# Altium PCB PCB1.PcbDoc
Units mil, origin at the board's own origin, x right, y up, seen from the top; angles counter-clockwise.
Board outline 540 x 340 mil, 2 copper layers (Top Layer, Bottom Layer); 5 components, 5 nets, 12 pads, 0 vias.
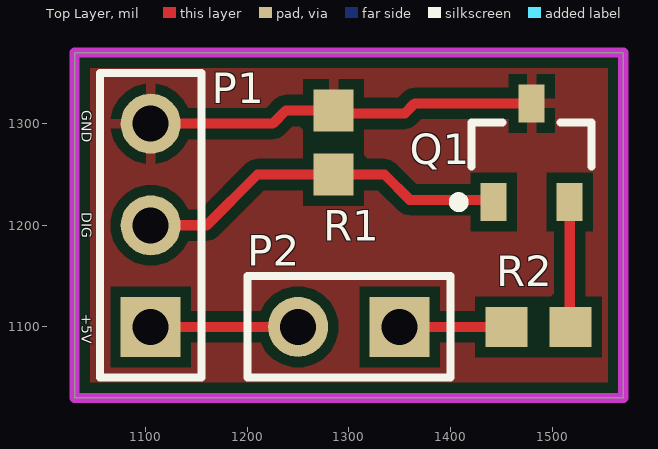
[diagram p0: Top Layer view]
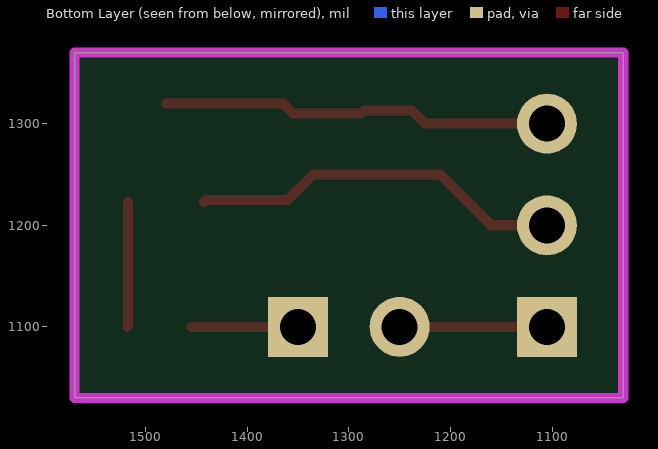
[diagram p1: Bottom Layer view, seen from below]

## Layer stack, top to bottom
Top Solder: solder mask 0.4, Solder Resist, Dk 3.5
Top Layer: signal copper 1.4
Dielectric 1: dielectric 12.6, FR-4, Dk 4.8
Bottom Layer: signal copper 1.4
Bottom Solder: solder mask 0.4, Solder Resist, Dk 3.5

## Board outline
1030,1030 1030,1370 1570,1370 1570,1030

## Design rules (kind name [scope] priority, off if disabled: settings)
Clearance [All] p1: gap=10 ignorepadtopadclearanceinfootprint=FALSE except(0: Arc-Hole Track-Hole SMDPad-Hole THPad-Hole Via-Hole Fill-Hole Poly-Hole Region-Hole Text-Hole; 5: Track-Track Track-SMDPad SMDPad-SMDPad; 7: Track-Via)
HoleSize [All] p1: absolutevalues=TRUE maxlimit=150 minlimit=10 maxpercent=80.000 minpercent=20.000
MinimumAnnularRing [All] p1: minimumring=7
MinimumSolderMaskSliver [All] p1: minsoldermaskwidth=1
PolygonConnect [All] p1: connectstyle=Relief reliefconductorwidth=10 reliefentries=4 polygonreliefangle="90 Angle" airgapwidth=10
RoutingVias [All] p1: holewidth=10 width=22 viastyle="Through Hole" minholewidth=10 minwidth=22 maxholewidth=100 maxwidth=150
SilkToSolderMaskClearance [IsPad] p1: minsilkscreentomaskgap=5 clearancetoexposedcopper=TRUE
SolderMaskExpansion [All] p1: expansion=4 istentingtop=FALSE
Width [All] p1: maxlimit=150 minlimit=8 preferedwidth=10
27 further rules are at their usual default settings.

## Classes and differential pairs
component class Sheet1: P2 Q1 R1 R2

## Components (designator, comment, footprint, x,y, rotation, side; value= is the part's Value field where it differs from the comment)
P1 "Header 3" HDR1X3 1105,1100 r90 top
P2 "Header 2" HDR1X2 1350,1100 r180 top
Q1 "BSS138" BSS138 1480,1271.38 r90 top
R1 "Res" RES0603 1285,1281.5 r270 top value=10k
R2 "Res" RES0603 1486.5,1100 r180 top value=10k

## Footprints (in the part's own frame and the unit in brackets; to place one, negate y for a bottom-side part, rotate by r counter-clockwise, add the part's x,y. Pads: shape width x height; smd on the part's side, far side on the other; paste and mask are expansions set on the pad)
BSS138 [mm] "MOSFET N-CH 50V 220MA SOT-23"
  rect 0.95x0.65 smd: D(1.235,0) G(-1.235,0.95) S(-1.235,-0.95)
  silkscreen extent -1.36,-1.5 0.76,1.95, body extent -0.76,-1.52 0.76,1.52, height 1.12
HDR1X2 [mm] "Connector; Header; 2 Position"
  rect 1.5x1.5 hole 0.9: 1(0,0)
  round 1.5 hole 0.9: 2(2.54,0)
  silkscreen extent -1.27,-1.27 3.81,1.27
HDR1X3 [mm] "Connector; Header; 3 Position"
  rect 1.5x1.5 hole 0.9: 1(0,0)
  round 1.5 hole 0.9: 2(2.54,0) 3(5.08,0)
  silkscreen extent -1.27,-1.27 6.35,1.27
RES0603 [mm] "Chip Resistor, 2-Leads, Body 1.60x0.80mm, IPC Medium Density"
  rect 1.05x1 smd: 1(-0.8,0) 2(0.8,0)
  body extent -0.88,-0.48 0.87,0.47, height 0.8

## Part data
P1: "Header, 3-Pin", LatestRevisionDate=17-Jul-2002, LatestRevisionNote="Re-released for DXP Platform.", Publisher="Altium Limited"
P2: "Header, 2-Pin", LatestRevisionDate=17-Jul-2002, LatestRevisionNote="Re-released for DXP Platform.", Publisher="Altium Limited"
Q1: "MOSFET N-CH 50V 220MA SOT-23", Supplier Part Number 1=BSS138CT-ND, Supplier 1=Digi-Key
R1 R2: Supplier Part Number 1=RMCF0603JT10K0CT-ND, Supplier 1=Digi-Key

## Nets (pads, with @x,y where several pads share a name; then routed paths per layer and width w, separated by ;. In a path a pad name is that pad's centre, name@x,y a point inside that pad or via, vN(x,y) a via of type N, cw(c..) or ccw(c..) an arc to the next point about the centre after c; other vN are vias at no path point)
+5: P1.1 P2.2 | length 145
  Top Layer w10: P1.1 P2.2
"DIG PIN": P1.2 Q1.G R1.2 | length 369.6
  Top Layer w10: P1.2 1160,1200 1210,1250 R1.2 1335,1250 1360,1225 1440.35,1225 Q1.G
GND: P1.3 Q1.D R1.1 | length 385.8
  Top Layer w10: P1.3 1225,1300 1237.99,1312.99 R1.1 1287.99,1310 1355,1310 1365,1320 Q1.D
NetP?_1: P2.1 R2.2 | length 105
  Top Layer w10: P2.1 R2.2
NetQ1_S: Q1.S R2.1 | length 123
  Top Layer w10: Q1.S 1517.4,1100.59 R2.1

## Polygon pours and split planes (outlines as drawn)
GND on Top Layer "GND_L01_P004" (solid, pour order 4): 1575,1375 1025,1375 1025,1025 1575,1025

## Keep-outs
Keep-Out Layer:
  the board outline again, w10

## Silkscreen, mask and mechanical layers (free items; w line width, h text height)
Top Overlay:
  text "GND" at 1037,1313 h10 r270
  text "DIG" at 1037,1213 h10 r270
  text "+5V" at 1037,1113 h10 r270